# Altium PCB 27-07-2023PCB_FEZA_GÖREV_2024-11-27.pcbdoc
Units mm, origin at the board's own origin, x right, y up, seen from the top; angles counter-clockwise.
Board outline 136.14 x 116.78 mm, 2 copper layers (Top Layer, Bottom Layer); 12 components, 8 nets, 131 pads, 7 vias.
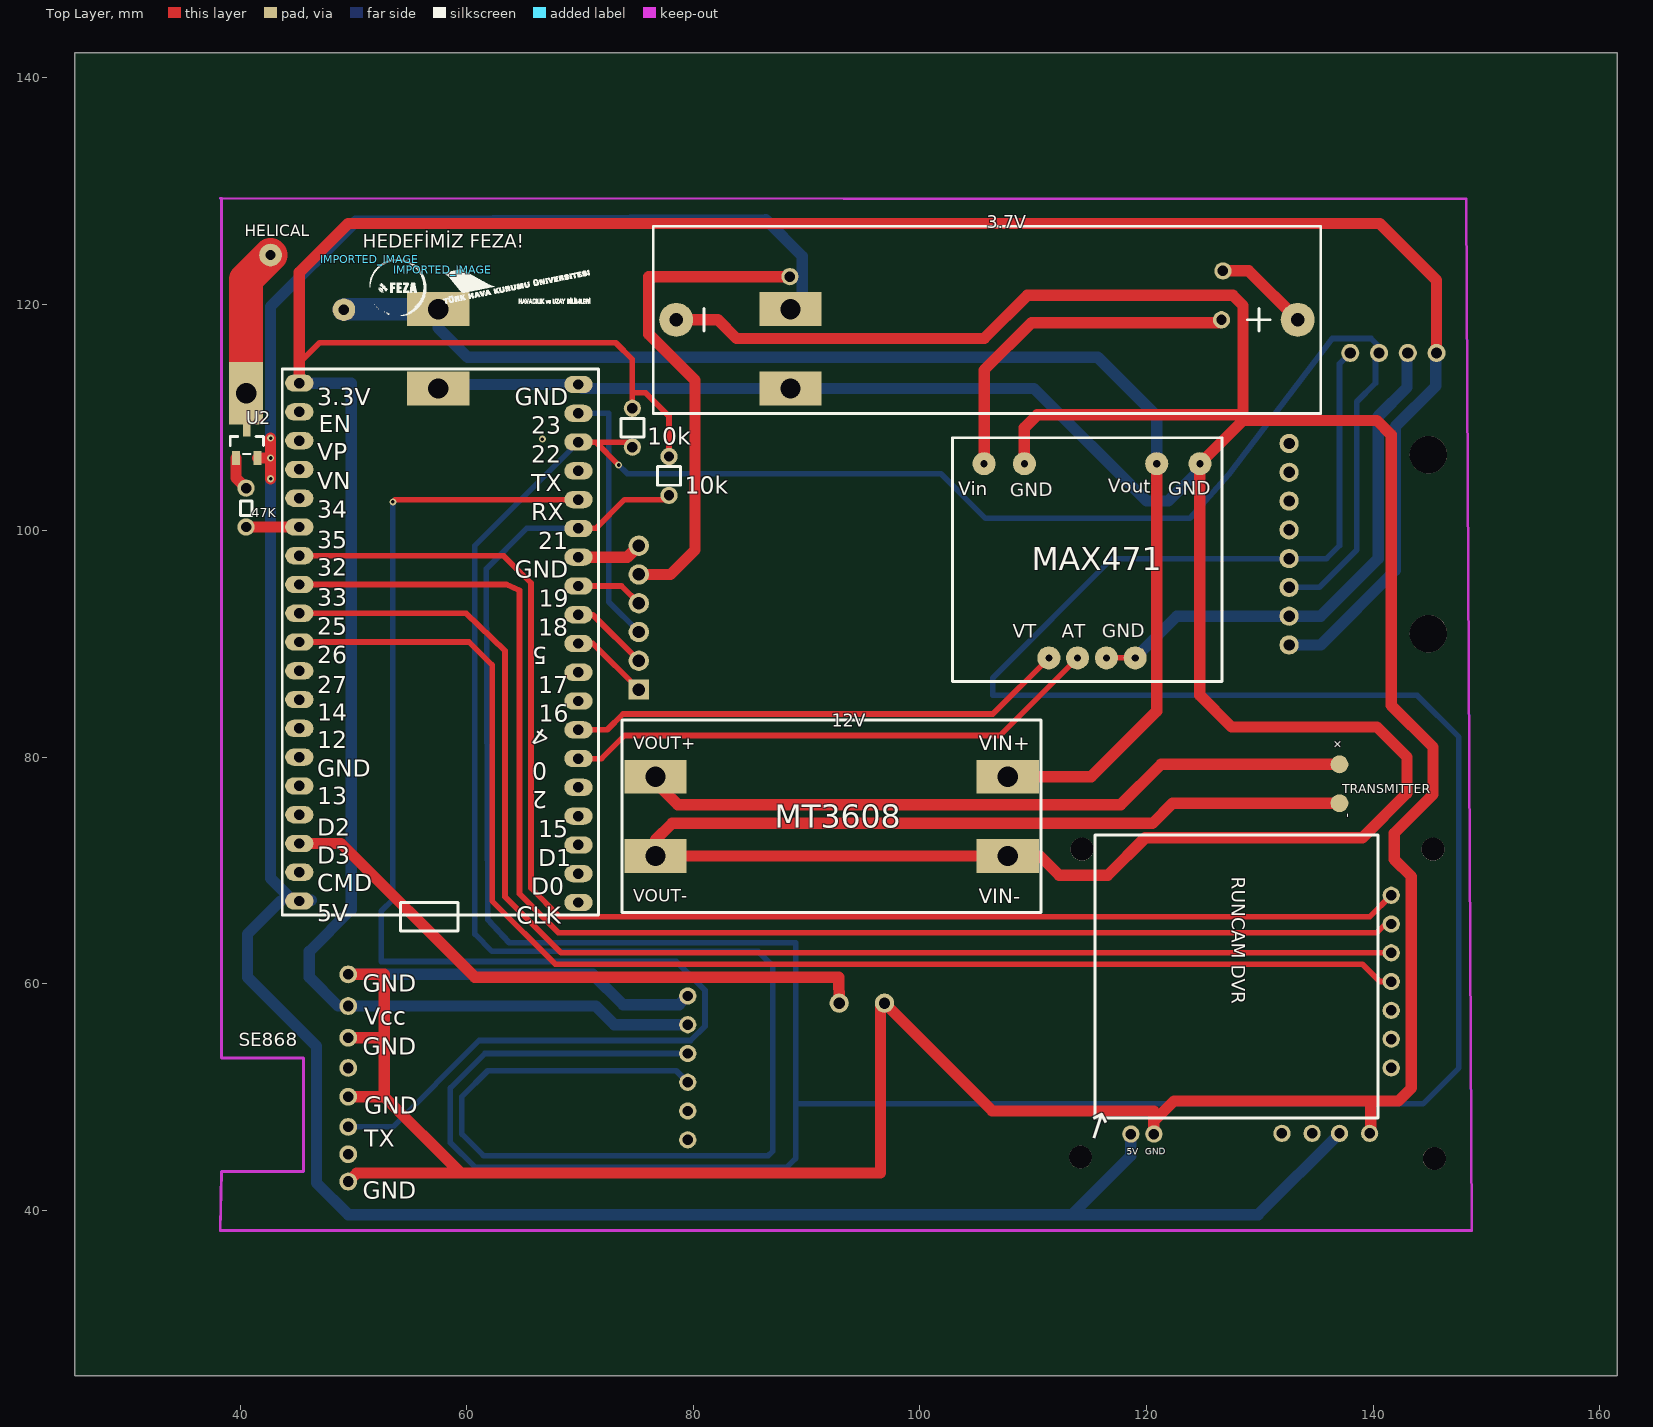
[diagram p0: Top Layer view]
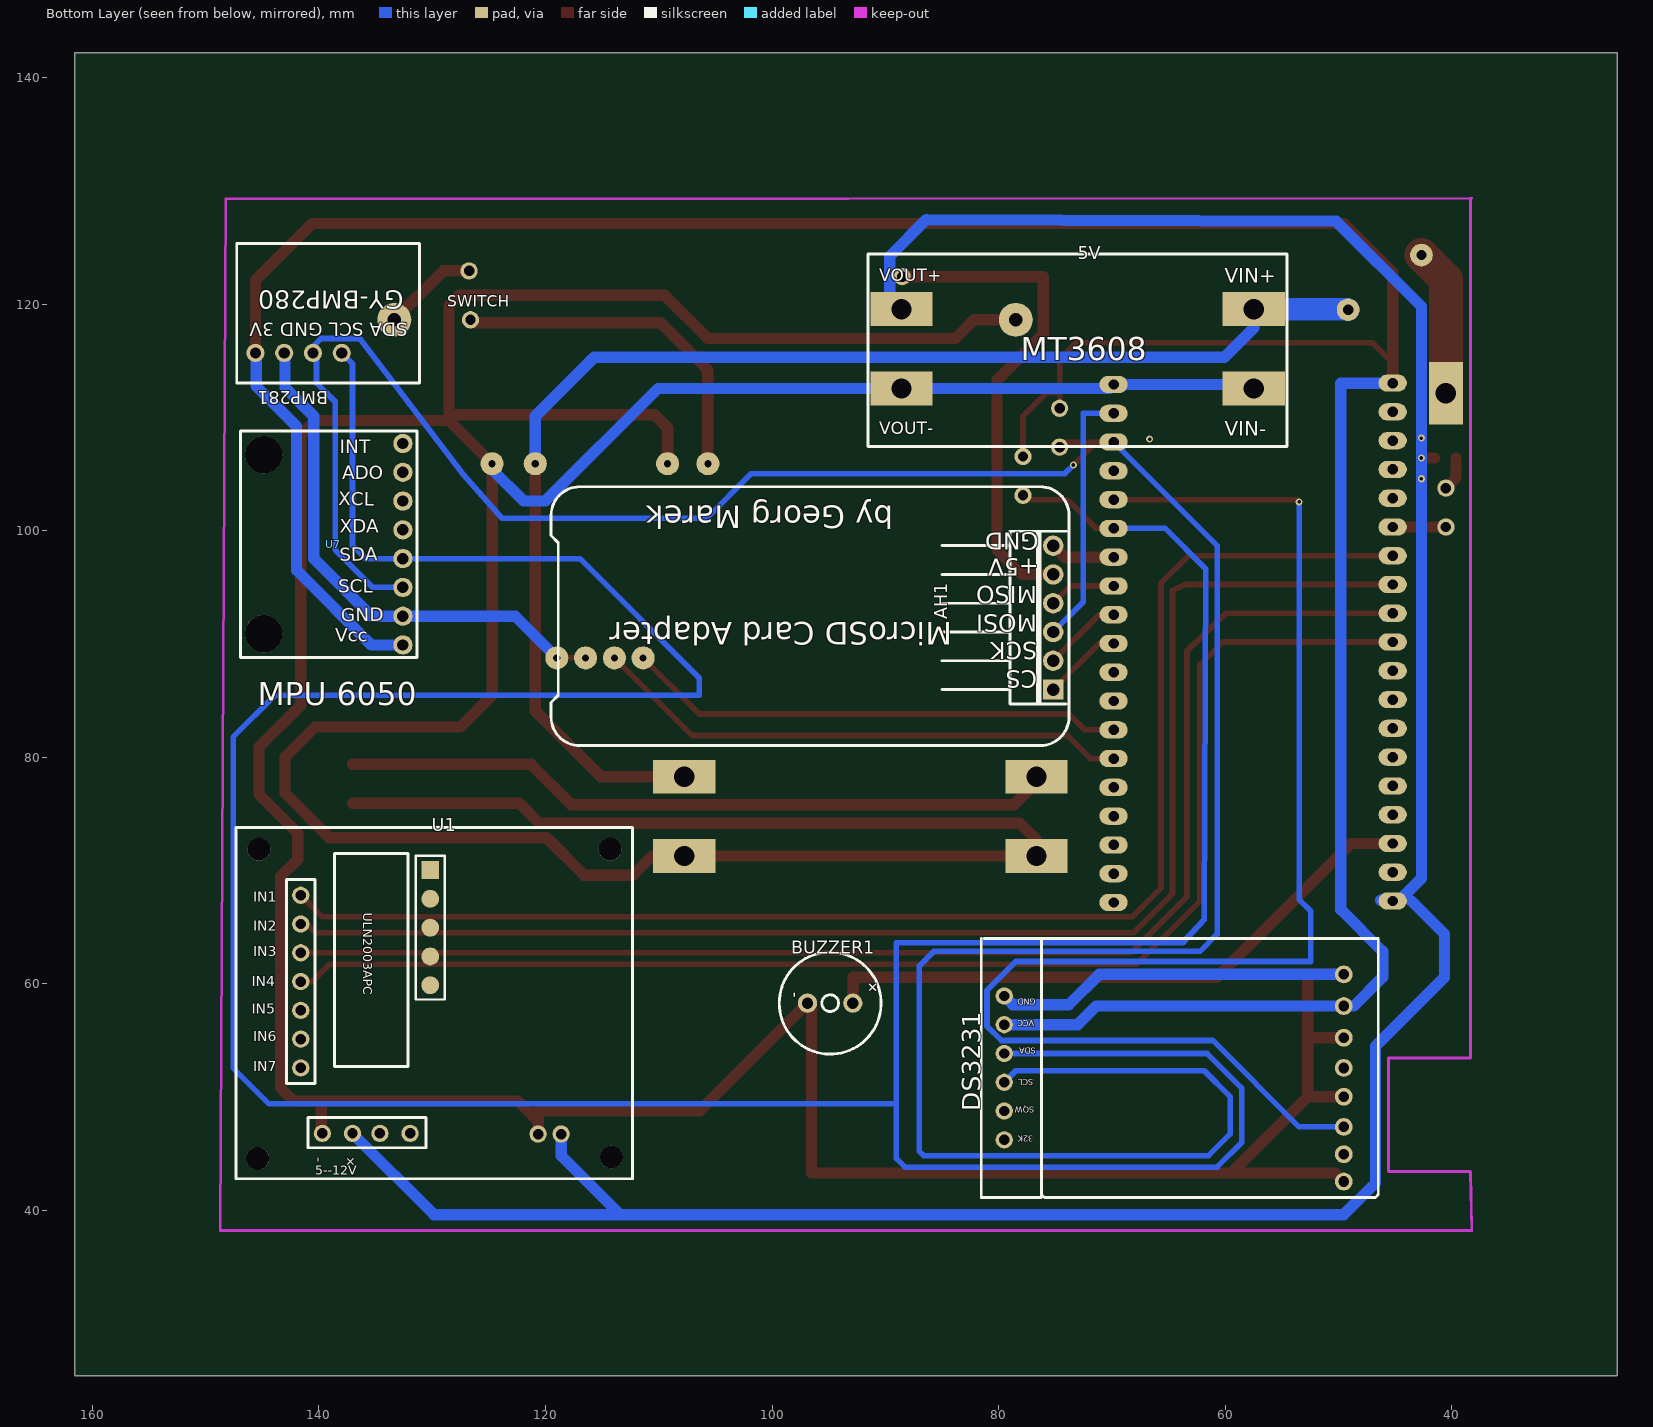
[diagram p1: Bottom Layer view, seen from below]

## Layer stack, top to bottom
Top Layer: signal copper (thickness not stored)
Dielectric: dielectric 0.32, FR-4, Dk 4.8
Bottom Layer: signal copper (thickness not stored)

## Board outline
161.544,25.4 25.4,25.4 25.4,142.181 161.544,142.181

## Components (designator, comment, footprint, x,y, rotation, side; value= is the part's Value field where it differs from the comment)
3.7V "BATTERY-AA-PANEL" BATTERY-AA-PANEL 105.918,118.618 r0 top
5V "MT3608" ?#1 73.025,116.84 r0 bottom
12V "MT3608" ?#2 92.202,75.565 r0 top
AH1 "2.54-1*6PHeader-RA" HDR-TH_6P-P2.54-H-W10.0 75.184,92.329 r270 bottom
BMP281 "GY-BMP80" ?#3 139.192,118.237 r180 bottom
BUZZER1 "BUZZER9040" BUZZER9040 94.869,58.293 r180 bottom
DS3231 "RTC Module DS3231" ?#4 79.502,51.308 r90 bottom
IMPORTED_IMAGE "IMPORTED_IMAGE" IMPORTED_IMAGE 57.889,123.03 r0 top
IMPORTED_IMAGE "IMPORTED_IMAGE" IMPORTED_IMAGE 51.408,123.962 r0 top
U1 "ULN2003-STEPPER-MOTOR-DRIVER" ULN2003-STEPPER-MOTOR-DRIVER 147.32,73.787 r0 bottom
U2 "BSH108" BSH108 40.513,107.696 r0 top
U7 "MPU6050" MPU6050 132.588,98.806 r90 bottom

## Footprints (in the part's own frame and the unit in brackets; to place one, negate y for a bottom-side part, rotate by r counter-clockwise, add the part's x,y. Pads: shape width x height; smd on the part's side, far side on the other; paste and mask are expansions set on the pad)
BATTERY-AA-PANEL [mm]
  round 3 hole 1.168 paste+0 mask+0.051: +(27.432,0) -(-27.432,0)
  silkscreen extent -24.99,-0.99 24.99,0.99
BSH108 [mm]
  rect 0.7x1.25 smd paste+0 mask+0.102: 1(-0.889,-1.27) 2(1.011,-1.27) 3(0.061,1.229)
  silkscreen extent -1.4,-0.92 1.52,0.63
BUZZER9040 [mm]
  round 1.7 hole 1 paste+0 mask+0.051: 1(2,0) 2(-2,0)
  silkscreen extent -4.5,-4.5 4.5,4.5
HDR-TH_6P-P2.54-H-W10.0 [mm]
  rect 1.8x1.8 hole 1.1 paste+0 mask+0.102: 1(6.35,0)
  round 1.8 hole 1.1 paste+0 mask+0.102: 2(3.81,0) 3(1.27,0) 4(-1.27,0) 5(-3.81,0) 6(-6.35,0)
  silkscreen extent -7.62,-9.81 7.62,-1.14
IMPORTED_IMAGE [mm]
  silkscreen extent 0,-2.99 13,0.01
MPU6050 [mm]
  round 1.7 hole 1 paste+0 mask+0.05: 1(8.89,0) 2(6.35,0) 3(3.81,0) 4(1.27,0) 5(-1.27,0) 6(-3.81,0) 7(-6.35,0) 8(-8.89,0)
  round 3.3 hole 3.3 unplated paste+0: ""(-7.9,12.3) ""(7.9,12.3)
  silkscreen extent -10,-1.25 10,14.35
ULN2003-STEPPER-MOTOR-DRIVER [mil]
  round 60 hole 36 paste+0 mask+4: 1(-225,235) 2(-225,335) 3(-225,435) 4(-225,535) 5(-225,635) 6(-225,735) 7(-225,835) 8(-300,1062.5) 9(-405,1062.5) 10(-500,1062.5) 11(-605,1062.5)
  round 62 smd paste+0 mask+4: 12(-675,547.5) 13(-675,447.5) 15(-675,247.5) 17(-675,347.5)
  rect 62x62 smd paste+0 mask+4: 16(-675,147.5)
  round 80 hole 80 unplated paste+0: ""(-1305,1145) ""(-1300,75) ""(-80,75) ""(-75,1150)
  silkscreen extent -1378,0 0,1220
?#1 [mm]
  rect 5.5x3 hole 1.798 paste+0 mask+0.102: 1(-15.546,-2.715) 1(-15.546,4.284) 1(15.546,-2.715) 1(15.546,4.284)
?#2 [mm]
  rect 5.5x3 hole 1.798 paste+0 mask+0.102: 1(-15.546,-4.284) 1(-15.546,2.715) 1(15.546,-4.284) 1(15.546,2.715)
?#3 [mm]
  round 1.6 hole 1 paste+0 mask+0.051: 1(-6.413,-2.546) 1(-3.873,-2.546) 1(-1.334,-2.546) 1(1.206,-2.546)
  silkscreen extent -8.06,-5.21 8.06,7.11
?#4 [mm]
  round 1.524 hole 0.914 paste+0 mask+0.051: 5V(5.08,0) 32k(-5.08,0) GND(7.62,0) SCL(0,0) SDA(2.54,0) SQW(-2.54,0)
  silkscreen extent -10.16,-33.02 12.7,2.03

## Free pads (board coordinates)
  oval 2.5x1.524 hole 0.914 paste+0 mask+0.102: 1(45.212,113.03) 2(45.212,110.49) 3(45.212,107.95) 4(45.212,105.41) 5(45.212,102.87) 6(45.212,100.33) 7(45.212,97.79) 8(45.212,95.25) 9(45.212,92.71) 10(45.212,90.17) 11(45.212,87.63) 12(45.212,85.09) 13(45.212,82.55) 14(45.212,80.01) 15(45.212,77.47) 16(45.212,74.93) 17(45.212,72.39) 18(45.212,69.85) 19(45.212,67.31) 20(69.85,67.183) 21(69.85,69.723) 22(69.85,72.263) 23(69.85,74.803) 24(69.85,77.343) 25(69.85,79.883) 26(69.85,82.423) 27(69.85,84.963) 28(69.85,87.503) 29(69.85,90.043) 30(69.85,92.583) 31(69.85,95.123) 32(69.85,97.663) 33(69.85,100.203) 34(69.85,102.743) 35(69.85,105.283) 36(69.85,107.823) 37(69.85,110.363) 38(69.85,112.903)
  round 1.524 hole 0.914 paste+0 mask+0.051: 1(74.612,107.379) 1(77.851,103.124) 2(74.612,110.808) 2(77.851,106.553) 50(126.746,122.936) 52(126.619,118.618) 54(88.519,122.428) 56(40.513,100.33) 57(40.513,103.759) GND(118.618,46.736) GND(120.65,46.736)
  round 2.032 hole 0.635 paste+0 mask+0.102: 1(105.664,105.918) 1(109.22,105.918) 1(111.379,88.773) 1(113.919,88.773) 1(116.459,88.773) 1(118.999,88.773) 1(120.904,105.918) 1(124.714,105.918)
  round 1.575 hole 0.945 paste+0 mask+0.102: 42(49.53,52.578) 43(49.53,50.038) 44(49.53,47.371) 45(49.53,42.545) 45(49.53,44.958) 45(49.53,55.245) 45(49.53,58.039) 45(49.53,60.833)
  round 1.575 smd paste+0 mask+0.102: 47(137.033,79.375) 49(137.033,75.946)
  round 2 hole 0.914 paste+0 mask+0.051: 58(49.149,119.507) 59(42.672,124.333)
  rect 3x5.5 hole 1.798 paste+0 mask+0.102: 60(40.513,112.141)

## Via types
v1: diameter 0.62, hole 0.31, Top Layer to Bottom Layer, tented both sides, 7 vias

## Nets (pads, with @x,y where several pads share a name; then routed paths per layer and width w, separated by ;. In a path a pad name is that pad's centre, name@x,y a point inside that pad or via, vN(x,y) a via of type N, cw(c..) or ccw(c..) an arc to the next point about the centre after c; other vN are vias at no path point)
CS: 3.7V.+ 3.7V.- 5V.1 12V.1 AH1.1 AH1.2 AH1.3 AH1.4 AH1.5 AH1.6 BMP281.1 BUZZER1.1 BUZZER1.2 DS3231.5V DS3231.GND DS3231.SCL DS3231.SDA pad.1 pad.2@74.612,110.808 pad.2@77.851,106.553 pad.3 pad.4 pad.6 pad.7 pad.8 pad.9 pad.10 pad.12 pad.13 pad.14 pad.15 pad.16 pad.17 pad.19 pad.21 pad.22 pad.25 pad.26 pad.27 pad.28 pad.29 pad.30 pad.31 pad.32 pad.33 pad.34 pad.35 pad.36 pad.37 pad.38 pad.42 pad.43 pad.44 pad.45 pad.47 pad.49 pad.50 pad.52 pad.54 pad.56 pad.57 pad.58 pad.59 pad.60 pad.GND U1.1 U1.2 U1.3 U1.4 U1.8 U1.9 U2.1 U2.2 U2.3 U7.5 U7.6 U7.7 U7.8 | length 2884.1
  Top Layer w0.5: pad.10 60.198,90.17 62.23,88.138 62.23,67.31 67.818,61.722 139.065,61.722 140.589,60.198 U1.4 ; pad.9 59.817,92.71 59.944,92.71 63.373,89.408 63.373,67.691 68.326,62.738 U1.3 ; pad.8 63.5,95.25 64.643,94.742 64.643,67.945 68.072,64.516 140.335,64.516 141.097,65.278 U1.2 ; pad.7 63.246,97.79 65.659,95.377 65.659,68.453 68.199,65.913 139.7,65.913 U1.1 ; pad.1@45.212,113.03 45.212,114.808 46.99,116.586 73.152,116.586 74.612,115.126 pad.2@74.612,110.807 ; v1(53.467,102.54) 53.67,102.743 pad.34 ; pad.25 71.882,79.883 73.914,81.915 107.061,81.915 pad.1@113.919,88.773 ; pad.26 72.39,82.423 73.787,83.82 106.426,83.82 pad.1@111.379,88.773 ; pad.29 71.12,90.043 v1(75.184,85.979) ; pad.30 71.12,92.583 AH1.2 ; pad.31 73.66,95.123 AH1.4 ; pad.33 71.374,100.203 73.914,102.743 77.47,102.743 pad.1@77.851,103.124 ; v1(73.397,105.8) 71.374,107.823 pad.36 74.168,107.823 pad.1@74.612,107.379 ; 74.612,112.171 75.789,112.171 77.851,110.109 pad.2@77.851,106.553 ; 12V.1@105.839,78.28 12V.1@107.748,78.28 ; pad.1@116.459,88.773 pad.1@118.999,88.773
  Top Layer w1: U2.1 39.624,104.648 pad.57 ; pad.56 pad.6 ; U2.2 v1(42.672,106.419) ; v1(42.672,104.586) v1(42.672,106.419) ; v1(42.672,108.179) v1(42.672,106.419) ; pad.17 48.895,72.39 60.706,60.579 92.266,60.579 92.837,60.579 BUZZER1.1 ; pad.1@45.212,113.03 45.212,122.809 49.53,127.127 140.589,127.127 145.606,122.111 BMP281.1@145.606,115.691 ; pad.45@49.53,42.545 50.292,43.307 96.52,43.307 96.52,58.293 BUZZER1.2 ; pad.43 52.705,50.038 52.705,60.833 pad.45@49.53,60.833 ; pad.45@49.53,55.245 52.705,55.245 ; 52.632,50.102 59.383,43.37 ; pad.32 74.168,97.663 AH1.6 ; AH1.5 77.978,96.139 80.137,98.298 80.137,113.284 76.073,117.348 76.073,122.428 pad.54 ; 12V.1@76.655,78.28 76.655,77.777 78.613,75.819 117.729,75.819 121.285,79.375 pad.47 ; 3.7V.- 82.169,118.618 83.82,116.967 105.664,116.967 109.474,120.777 127.635,120.777 128.524,119.888 128.524,109.728 ; BUZZER1.2 106.394,48.768 120.65,48.768 pad.GND@120.65,46.736 ; pad.1@105.664,105.918 105.664,114.173 109.855,118.364 126.365,118.364 pad.52 ; 12V.1@107.748,71.281 110.584,71.281 112.268,69.596 116.586,69.596 119.888,72.898 139.065,72.898 143.002,76.835 143.002,80.01 140.335,82.677 127.508,82.677 124.714,85.471 124.714,105.918 128.524,109.728 ; 12V.1@107.749,71.28 76.655,71.28 76.655,72.718 78.105,74.168 120.523,74.168 122.301,75.946 pad.49 ; 12V.1@107.749,78.28 115.11,78.28 120.904,84.074 pad.1@120.904,105.918 ; pad.1@109.22,105.918 109.22,109.093 110.363,110.236 128.524,110.236 ; 120.65,47.886 122.421,49.657 142.24,49.657 143.383,50.8 143.383,69.469 141.859,70.993 141.859,73.279 145.288,76.708 145.288,80.899 141.605,84.582 141.605,108.458 140.335,109.728 128.524,109.728 ; pad.50 129.032,122.936 3.7V.+ ; U1.8 139.787,46.887 139.787,49.657
  Top Layer w3: pad.60 40.513,122.174 pad.59
  Bottom Layer w0.5: pad.44 53.467,47.371 61.087,54.991 79.756,54.991 81.026,56.261 81.026,59.436 78.486,61.976 72.644,61.976 52.451,61.976 52.451,66.421 53.467,67.437 v1(53.467,102.54) ; pad.33 65.532,100.203 65.278,100.203 61.722,96.647 61.849,65.659 63.754,63.627 89.027,63.627 89.027,44.577 88.265,43.815 60.706,43.815 58.547,45.974 58.547,50.8 61.595,53.848 DS3231.SDA ; pad.36 60.706,98.679 60.706,64.389 62.23,62.865 85.725,62.865 86.995,61.595 86.995,45.212 86.614,44.831 61.468,44.831 59.563,46.736 59.563,50.038 61.849,52.324 78.486,52.324 DS3231.SCL ; pad.37 72.517,110.363 72.517,93.726 AH1.3 ; v1(73.397,105.8) 74.168,105.029 101.854,105.029 105.791,101.092 123.825,101.092 127.254,104.959 136.398,116.967 139.827,116.967 140.525,116.268 140.525,115.691 140.208,115.373 140.208,113.03 138.557,111.379 138.557,98.298 135.255,94.996 U7.6 ; 89.027,49.403 144.399,49.403 147.574,52.578 147.574,81.788 143.891,85.471 106.426,85.471 106.426,86.995 116.967,97.536 U7.5 135.89,97.536 137.033,98.679 137.033,114.739 BMP281.1@137.986,115.692
  Bottom Layer w1: 43.561,67.31 40.64,64.389 40.64,60.579 46.736,54.483 46.736,42.418 49.53,39.624 113.411,39.624 ; pad.1@45.212,113.03 49.784,113.03 49.784,66.548 46.101,62.865 46.101,60.579 48.641,58.039 49.53,58.039 71.374,58.039 73.025,56.388 DS3231.5V ; pad.19@46.266,67.373 44.615,67.373 42.672,69.317 v1(42.672,104.586) v1(42.672,106.419) 42.672,107.616 v1(42.672,108.179) 42.672,119.786 50.203,127.317 86.398,127.444 89.624,124.216 5V.1@89.624,119.619 ; pad.45@49.53,60.833 71.12,60.833 73.787,58.166 78.74,58.166 DS3231.GND ; 5V.1@57.479,112.556 57.826,112.903 pad.38 70.198,112.556 88.571,112.556 110.076,112.556 120.015,102.616 121.92,102.616 124.714,105.41 pad.1@124.714,105.918 ; 5V.1@57.479,119.554 57.479,117.908 60.071,115.316 115.697,115.316 120.904,110.109 pad.1@120.904,105.918 ; pad.GND@118.618,46.736 118.618,44.831 113.411,39.624 ; pad.1@118.999,88.773 122.682,92.456 U7.7 135.382,92.456 140.462,97.536 140.462,110.109 143.002,112.649 143.002,115.627 BMP281.1@143.065,115.691 ; U7.8 135.382,89.916 141.986,96.52 141.986,109.22 145.542,112.776 145.542,115.628 BMP281.1@145.606,115.692 ; U1.9 129.857,39.624 113.411,39.624
  Bottom Layer w2: pad.58 49.196,119.554 5V.1@57.479,119.554
S$7: 
S$456: 
S$461: 
S$464: 
S$483: 
S$815: 
S$817: 
pads on no net: DS3231.32k DS3231.SQW U1. U1.5 U1.6 U1.7 U1.10 U1.11 U1.12 U1.13 U1.15 U1.16 U1.17 U7. U7.1 U7.2 U7.3 U7.4
copper on no net:
  other v1: 66.675,108.077

## Silkscreen, mask and mechanical layers (free items; w line width, h text height)
Top Overlay:
  lines w0.254: 40.005,101.346 41.021,101.346 41.021,102.616 40.005,102.616 40.005,101.346 ; 43.708,66.07 71.608,66.07 71.608,114.27 43.708,114.27 43.708,66.07 ; 54.135,64.653 59.215,64.653 59.215,67.193 54.135,67.193 54.135,64.653 ; 73.596,108.268 73.596,109.919 75.629,109.919 75.629,108.268 73.596,108.268 ; 73.702,66.28 110.702,66.28 110.702,83.28 73.702,83.28 73.702,66.28 ; 76.454,110.363 135.382,110.363 135.382,126.873 76.454,126.873 76.454,110.363 ; 76.835,104.013 76.835,105.664 78.867,105.664 78.867,104.013 76.835,104.013 ; 102.87,86.704 126.67,86.704 126.67,108.204 102.87,108.204 102.87,86.704 ; 115.443,48.152 140.443,48.152 140.443,73.152 115.443,73.152 115.443,48.152
  text "HELICAL" at 40.386,125.992 h1
  text "HEDEFİMİZ FEZA!" at 50.8,124.587 h2.03
  text "3.3V" at 46.813,111.097 h1.5
  text "GND" at 64.212,111.097 h1.5
  text "EN" at 46.94,108.684 h1.5
  text "23" at 65.685,108.553 h1.5
  text "10k" at 75.946,107.581 h1.5
  text "VP" at 46.813,106.204 h1.5
  text "22" at 65.685,106.01 h1.5
  text "VN" at 46.813,103.664 h1.5
  text "TX" at 65.685,103.466 h1.5
  text "10k" at 79.248,103.263 h1.5
  text "Vout" at 116.586,102.997 h2.03 r359
  text "Vin" at 103.378,102.743 h2.03
  text "GND" at 121.92,102.743 h2.03 r1
  text "GND" at 107.95,102.616 h2.03 r1
  text "47K" at 41.021,101.2 h0.8
  text "34" at 46.813,101.124 h1.5
  text "RX" at 65.685,100.922 h1.5
  text "35" at 46.813,98.457 h1.5
  text "21" at 66.3,98.379 h1.5
  text "MAX471" at 109.855,96.52 h2.03
  text "32" at 46.813,96.044 h1.5
  text "GND" at 64.212,95.835 h1.5
  text "33" at 46.813,93.377 h1.5
  text "19" at 66.369,93.291 h1.5
  text "25" at 46.813,90.837 h1.5
  text "18" at 66.3,90.747 h1.5
  text "VT" at 108.204,90.17 h2.03
  text "AT" at 112.522,90.17 h2.03
  text "GND" at 116.078,90.17 h2.03 r1
  text "5" at 67.09,89.704 h1.5 r180
  text "26" at 46.813,88.297 h1.5
  text "17" at 66.3,85.66 h1.5
  text "27" at 46.813,85.63 h1.5
  text "14" at 46.813,83.217 h1.5
  text "16" at 66.369,83.116 h1.5
  text "4" at 67.452,81.937 h1.5 r145
  text "+" at 137.443,81.055 h0.8 r135
  text "12" at 46.813,80.804 h1.5
  text "0" at 67.09,79.529 h1.5 r180
  text "GND" at 46.813,78.264 h1.5
  text "2" at 67.09,76.985 h1.5 r180
  text "TRANSMITTER" at 137.287,76.816 h0.8
  text "13" at 46.813,75.851 h1.5
  text "-" at 138.068,74.676 h0.8 r90
  text "D2" at 46.813,73.057 h1.5
  text "15" at 66.3,72.941 h1.5
  text "D3" at 46.813,70.584 h1.5
  text "D1" at 66.3,70.398 h1.5
  text "RUNCAM DVR" at 127.127,69.469 h2.03 r270
  text "CMD" at 46.813,68.171 h1.5
  text "D0" at 65.685,67.854 h1.5
  text "5V" at 46.813,65.504 h1.5
  text "CLK" at 64.349,65.31 h1.5
  text "GND" at 50.8,59.321 h1.5
  text "Vcc" at 50.927,56.4 h1.5
  text "SE868" at 39.878,54.102 h2.03
  text "GND" at 50.8,53.733 h1.5
  text "↓" at 117.602,48.895 h4 r162
  text "GND" at 50.927,48.526 h1.5
  text "TX" at 50.927,45.605 h1.5
  text "5V" at 118.237,44.704 h1
  text "GND" at 119.888,44.704 h1 r1
  text "GND" at 50.8,41.033 h1.5
Bottom Overlay:
  lines w0.254: 54.525,107.428 91.525,107.428 91.525,124.428 54.525,124.428 54.525,107.428
  lines w0.254 net S$456: 73.787,101.346 73.787,83.566 ccw(c76.327,83.566) 76.327,81.026 116.967,81.026
  lines w0.254 net S$461: 73.787,101.346 cw(c76.327,101.346) 76.327,103.886 116.967,103.886 cw(c116.967,101.346) 119.507,101.346
  lines w0.254 net S$464: 116.967,81.026 ccw(c116.967,83.566) 119.507,83.566
  lines w0.254 net S$483: 74.041,84.709 76.581,84.709 76.581,99.949 74.041,99.949
  lines w0.254 net S$815: 119.507,83.566 119.507,84.836 118.872,85.471 118.872,98.933 119.507,99.568 119.507,101.219
  lines w0.254 net S$817: 119.507,101.219 119.507,101.346
  text "SWITCH" at 128.651,119.769 h1
  text "INT" at 138.176,106.426 h2.03
  text "ADO" at 137.922,104.14 h2.03
  text "by Georg Marek" at 89.281,102.219 h2 r180
  text "XCL" at 138.303,101.854 h2.03 r1
  text "GND" at 76.454,99.81 h1.5 r180
  text "XDA" at 138.176,99.441 h2.03
  text "+5V" at 76.454,97.524 h1.5 r180
  text "SDA" at 138.176,96.901 h2.03 r359
  text "MISO" at 76.581,95.111 h1.5 r180
  text "SCL" at 138.303,94.107 h2.03
  text "MOSI" at 76.581,92.571 h1.5 r180
  text "MicroSD Card Adapter" at 84.074,91.932 h2 r180
  text "GND" at 138.049,91.567 h2.03 r359
  text "SCK" at 76.581,90.158 h1.5 r180
  text "Vcc" at 138.557,89.789 h2.03
  text "CS" at 76.581,87.618 h1.5 r180
  text "GND" at 76.708,58.67 h0.5 r180
  text "VCC" at 76.835,56.765 h0.5 r180
  text "SDA" at 76.708,54.352 h0.5 r180
  text "SCL" at 76.962,51.558 h0.5 r180
  text "SQW" at 76.835,49.145 h0.5 r180
  text "32K" at 76.962,46.605 h0.5 r180

## Text inside footprints (layer, text, board x,y; h text height)
5V: Bottom Overlay "VIN+" at 60.025,121.904 h1.3; Bottom Overlay "VIN-" at 60.025,108.404 h1.3; Bottom Overlay "VOUT+" at 90.525,122.004 h1.1; Bottom Overlay "VOUT-" at 90.525,108.504 h1.1
12V: Top Overlay "VIN+" at 105.202,80.629 h1.3; Top Overlay "VIN-" at 105.202,67.129 h1.3; Top Overlay "VOUT+" at 74.702,80.729 h1.1; Top Overlay "VOUT-" at 74.702,67.229 h1.1
BMP281: Bottom Overlay "SDA SCL GND 3V" at 132.143,118.343 h1.2 r180; Bottom Overlay "GY-BMP280" at 132.524,121.174 h1.6 r180
BUZZER1: Bottom Overlay "+" at 90.426,59.586 h1 r225; Bottom Overlay "-" at 97.646,58.763 h1 r270
U1: Bottom Overlay "5--12V" at 140.335,43.161 h0.8; Bottom Overlay "+" at 137.859,44.399 h0.9 r45; Bottom Overlay "-" at 140.404,44.704 h0.9 r90; Bottom Overlay "IN7" at 145.796,52.273 h0.9; Bottom Overlay "IN6" at 145.796,54.922 h0.9; Bottom Overlay "IN5" at 145.923,57.353 h0.9; Bottom Overlay "IN4" at 145.923,59.766 h0.9; Bottom Overlay "IN3" at 145.796,62.433 h0.9; Bottom Overlay "IN2" at 145.796,64.701 h0.9; Bottom Overlay "IN1" at 145.796,67.259 h0.9; Bottom Overlay "ULN2003APC" at 136.089,66.294 h0.8 r90
U7: Bottom Overlay "MPU 6050" at 145.415,84.582 h2.03